# Altium PCB BlinkerInline.PcbDoc
Units mm, origin at the board's own origin, x right, y up, seen from the top; angles counter-clockwise.
Board outline 41.27 x 30.48 mm, 2 copper layers (Top Layer, Bottom Layer); 10 components, 7 nets, 29 pads, 4 vias.
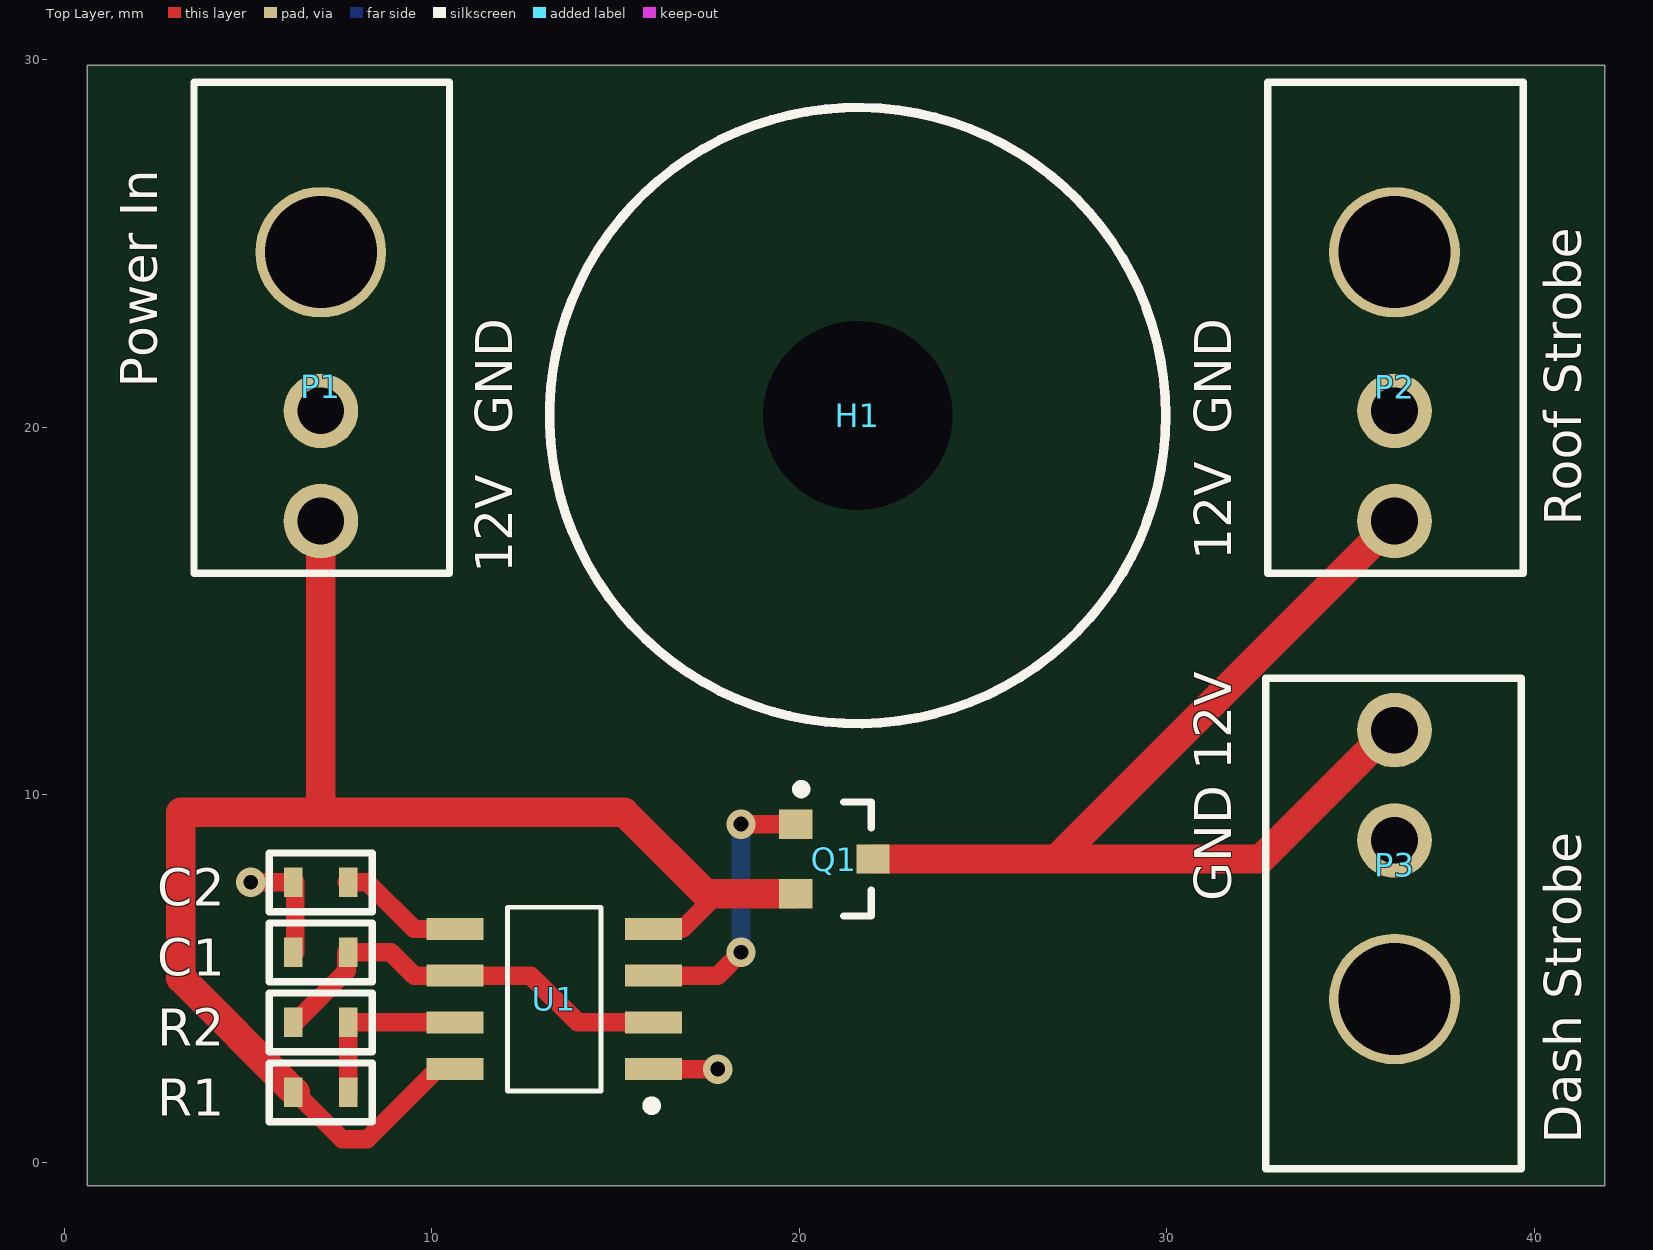
[diagram p0: Top Layer view]
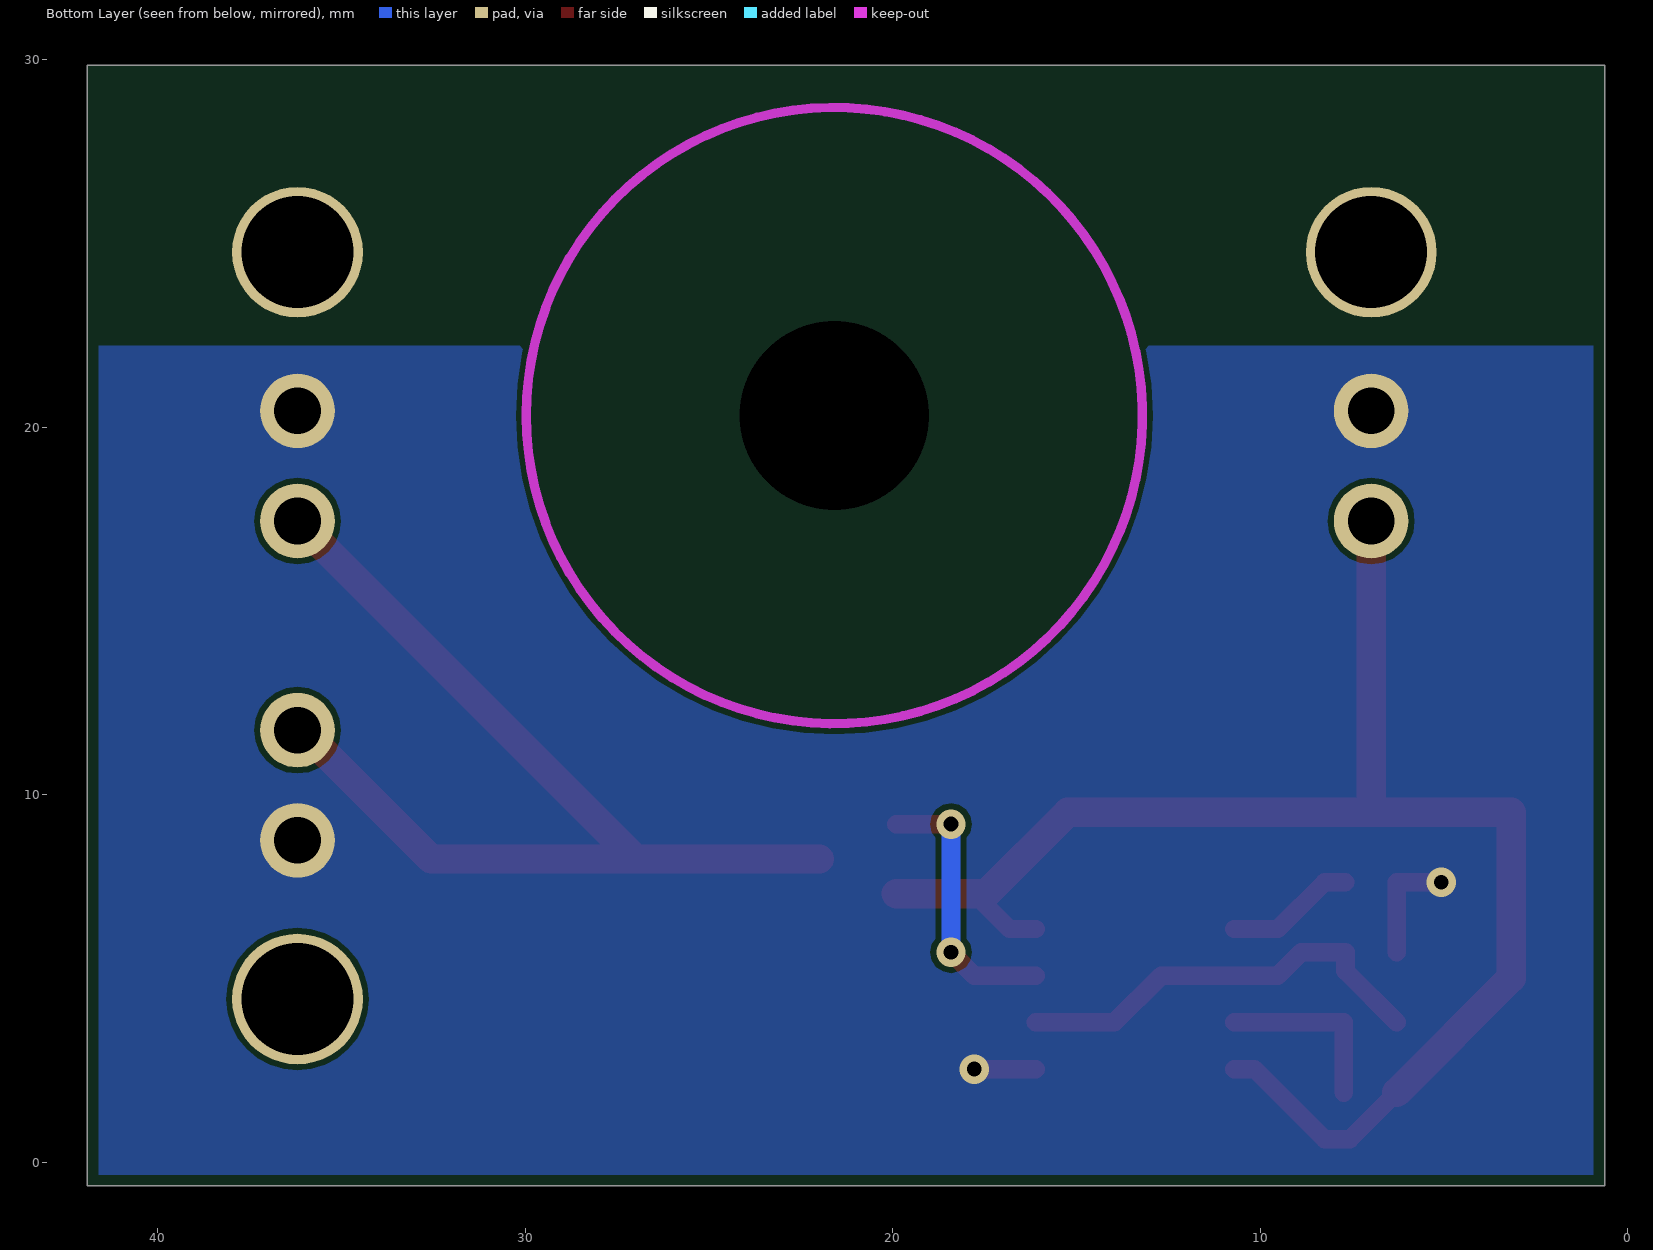
[diagram p1: Bottom Layer view, seen from below]

## Layer stack, top to bottom
Top Solder: solder mask 0.0102, Solder Resist, Dk 3.5
Top Layer: signal copper 0.0356
Dielectric 1: dielectric 0.32, FR-4, Dk 4.8
Bottom Layer: signal copper 0.0356
Bottom Solder: solder mask 0.0102, Solder Resist, Dk 3.5

## Board outline
0.635,-0.635 0.635,29.845 41.91,29.845 41.91,-0.635

## Design rules (kind name [scope] priority, off if disabled: settings)
BoardOutlineClearance [All] p1: gap=0.3 ignorepadtopadclearanceinfootprint=FALSE
Clearance [All] p1: gap=0.152 ignorepadtopadclearanceinfootprint=FALSE except(0: Arc-Hole Track-Hole SMDPad-Hole THPad-Hole Via-Hole Fill-Hole Poly-Hole Region-Hole Text-Hole)
ComponentClearance [All] p1: gap=0.1 collisioncheckmode=3 verticalgap=0.254 showdistances=FALSE
FabricationTestPointUsage TestPointUsage [All] p1: valid=0 allowmultiple=FALSE
FabricationTestpoint Testpoint [All] p1: side=3 testpointundercomponent=TRUE minsize=1.016 maxsize=2.54 preferedsize=1.524 minholesize=0 maxholesize=1.016 preferedholesize=0.813 testpointgrid=0.025 allowsidetop=TRUE allowsidebottom=TRUE usegrid=TRUE gridtolerance=0
HoleSize [All] p1: absolutevalues=TRUE maxlimit=6.3 minlimit=0.3 maxpercent=80.000 minpercent=20.000
HoleToHoleClearance [All] p1: gap=0.45 allowstackedmicrovias=TRUE
MinimumAnnularRing [All] p1: minimumring=0.15
MinimumSolderMaskSliver [All] p1: minsoldermaskwidth=0.075
PlaneClearance [All] p1: clearance=0.5
PlaneConnect [All] p1: planeconnectstyle=Direct reliefexpansion=0.508 reliefentries=4 reliefconductorwidth=0.254 reliefairgap=0.254
PolygonConnect "GND Via" [isVia AND InNet('GND')] p1: connectstyle=Direct reliefconductorwidth=0.254 reliefentries=4 polygonreliefangle="90 Angle" airgapwidth=0.254 // GND Via Connection
PolygonConnect [All] p2: connectstyle=Direct reliefconductorwidth=0.254 reliefentries=4 polygonreliefangle="90 Angle" airgapwidth=0.25
RoutingVias [All] p1: holewidth=0.3 width=0.6 viastyle="Through Hole" minholewidth=0.3 minwidth=0.6 maxholewidth=6.3 maxwidth=6.6
SilkToSilkClearance [All] p1: silktosilkclearance=0.15
SilkToSolderMaskClearance SilkscreenOverComponentPads [IsPad] p1: minsilkscreentomaskgap=0.25 clearancetoexposedcopper=TRUE
SolderMaskExpansion [All] p1: expansion=0.1
Width [All] p1: maxlimit=2 minlimit=0.152 preferedwidth=0.25 minimp=50.000000 maximp=50.000000 favimp=50.000000
20 further rules are at their usual default settings.

## Components (designator, comment, footprint, x,y, rotation, side; value= is the part's Value field where it differs from the comment)
C1 "SCH_GENERIC_CAPACITOR_0603" PCB_GENERIC_SMD_0603 6.985,5.715 r0 top
C2 "SCH_GENERIC_CAPACITOR_0603" PCB_GENERIC_SMD_0603 6.985,7.62 r0 top
H1 "Hole M4" #10Hole 4.064,6.731 r0 top
P1 "SCH_MLX_1X2" PCB_MLX_MICROFIT_1X2 6.985,22.733 r180 top
P2 "SCH_MLX_1X2" PCB_MLX_MICROFIT_1X2 36.195,22.733 r180 top
P3 "SCH_MLX_1X2" PCB_MLX_MICROFIT_1X2 36.195,6.477 r0 top
Q1 "PFET" SOT23F 20.955,8.255 r0 top
R1 "SCH_GENERIC_RESISTOR_0603" PCB_GENERIC_SMD_0603 6.985,1.905 r180 top
R2 "SCH_GENERIC_RESISTOR_0603" PCB_GENERIC_SMD_0603 6.985,3.81 r0 top
U1 "LMC555CMx/LMC555CN/LMC555IM" D-8 13.335,4.445 r90 top

## Footprints (in the part's own frame and the unit in brackets; to place one, negate y for a bottom-side part, rotate by r counter-clockwise, add the part's x,y. Pads: shape width x height; smd on the part's side, far side on the other; paste and mask are expansions set on the pad)
#10Hole [mil]
  round 0 hole 202.76 unplated mask+78.74: 1(690,535)
  Keep-Out Layer circle w10: c690,535 r330
  silkscreen extent 360,205 1020,865
D-8 [mm] "SOIC-8"
  rect 0.6x1.55 smd: 1(-1.905,-2.7) 2(-0.635,-2.7) 3(0.635,-2.7) 4(1.905,-2.7) 5(1.905,2.7) 6(0.635,2.7) 7(-0.635,2.7) 8(-1.905,2.7)
  silkscreen extent -3.03,-2.78 2.5,1.27, body extent -2.5,-2 2.5,2, height 1.75
PCB_GENERIC_SMD_0603 [mm]
  rect 0.5x0.8 smd: 1(-0.75,0) 2(0.75,0)
  silkscreen extent -1.4,-0.8 1.4,0.8, body extent -0.75,-0.5 0.75,0.5, height 0.45
PCB_MLX_MICROFIT_1X2 [mil]
  round 80 hole 50: 1(0,90) 2(0,208)
  round 140 hole 120: ""(0,-80)
  silkscreen extent -138,-262 136,264, body extent -141,-266 140,216, height 345
SOT23F [mm] "P-Channel 30V 6A (Ta) 1W (Ta) Surface Mount SOT-23F"
  rect 0.9x0.8 smd: 1(-1.05,0.95) 2(-1.05,-0.95) 3(1.05,0)
  silkscreen extent -1.02,-1.55 1,2.02, body extent -0.9,-1.45 0.9,1.45, height 0.8

## Part data
C1: "Generic SMD capacitor 0603", Capacitance=4.7uF, Tolerance=*%
C2: "Generic SMD capacitor 0603", Capacitance=0.01uF, Tolerance=*%
H1: library part #10Hole
Q1: "MOSFET P CH 30V 6A 2-3Z1A"
R1: "Generic SMD resistor 0603", Resistance=4.7k
R2: "Generic SMD resistor 0603", Resistance=100k
U1: "555 Type, Timer/Oscillator (Single) IC 3MHz 8-SOIC", Manufacturer="Texas Instruments", Part Number=LMC555CMX/NOPB

## Via types
v1: diameter 0.8, hole 0.4, Top Layer to Bottom Layer, 4 vias

## Nets (pads, with @x,y where several pads share a name; then routed paths per layer and width w, separated by ;. In a path a pad name is that pad's centre, name@x,y a point inside that pad or via, vN(x,y) a via of type N, cw(c..) or ccw(c..) an arc to the next point about the centre after c; other vN are vias at no path point)
12V: P1.2 Q1.2 R1.2 U1.4 U1.8 | length 42.3
  Top Layer w0.5: R1.2@6.285,1.905 6.291,1.905 7.561,0.635 8.255,0.635 10.16,2.54 U1.8 U1.8@10.71,2.54 ; U1.4@16.11,6.35 16.825,6.35 17.78,7.305
  Top Layer w0.8: R1.2@6.285,1.905 3.175,5.015 3.175,9.525 6.985,9.525 ; P1.2 6.985,9.525 ; Q1.2 17.78,7.305 17.46,7.305 15.24,9.525 6.985,9.525
GND: C1.1 C2.1 P1.1 P2.1 P3.1 U1.1 | length 4.8
  Top Layer w0.5: v1(5.08,7.62) C2.1 6.285,7.62 C1.1@6.285,5.715 ; U1.1@16.11,2.54 v1(17.78,2.54)
NetC1_2: C1.2 R2.1 U1.2 U1.6 | length 11.7
  Top Layer w0.508: R2.1@6.285,3.81 7.685,5.21 7.685,5.715 C1.2 8.89,5.715 9.525,5.08 U1.6 12.7,5.08 13.97,3.81 U1.2 U1.2@16.11,3.81
NetC2_2: C2.2 U1.5 | length 3.6
  Top Layer w0.5: C2.2@7.685,7.62 C2.2 8.255,7.62 9.525,6.35 U1.5 U1.5@10.71,6.35
NetP2_2: P2.2 P3.2 Q1.3 | length 28.7
  Top Layer w0.8: Q1.3 27,8.255 ; P3.2@36.131,11.824 32.563,8.255 27,8.255 ; P2.2@36.195,17.577 P2.2 27,8.255
NetQ1_1: Q1.1 U1.3 | length 7.5
  Top Layer w0.508: U1.3@16.11,5.08 17.78,5.08 v1(18.415,5.715) ; v1(18.415,9.205) Q1.1
  Bottom Layer w0.508: v1(18.415,5.715) v1(18.415,9.205)
NetR1_1: R1.1 R2.2 U1.7 | length 4.9
  Top Layer w0.508: R1.1 R2.2 U1.7 U1.7@10.71,3.81
pads on no net: H1.1 P1. P2. P3.

## Polygon pours and split planes (outlines as drawn)
GND on Bottom Layer "Bottom Layer-GND" (solid, remove dead copper, pour order 7): 0.073,22.225 43.18,22.225 43.18,-2.54 -0.635,-2.54

## Silkscreen, mask and mechanical layers (free items; w line width, h text height)
Top Overlay:
  text "Power In" at 2.54,21.082 h1 r90
  text "GND" at 12.192,19.812 h1 r90
  text "GND" at 31.75,19.812 h1 r90
  text "Roof Strobe" at 41.275,17.323 h1 r90
  text "12V" at 31.75,16.383 h1 r90
  text "12V" at 12.192,16.033 h1 r90
  text "12V" at 31.75,10.668 h1 r90
  text "GND" at 31.75,7.112 h1 r90
  text "Dash Strobe" at 41.275,0.508 h1 r90
Mechanical 5:
  the board outline again, w0.254